# EAGLE board lumped-transmission-line (EAGLE 7.7.0)
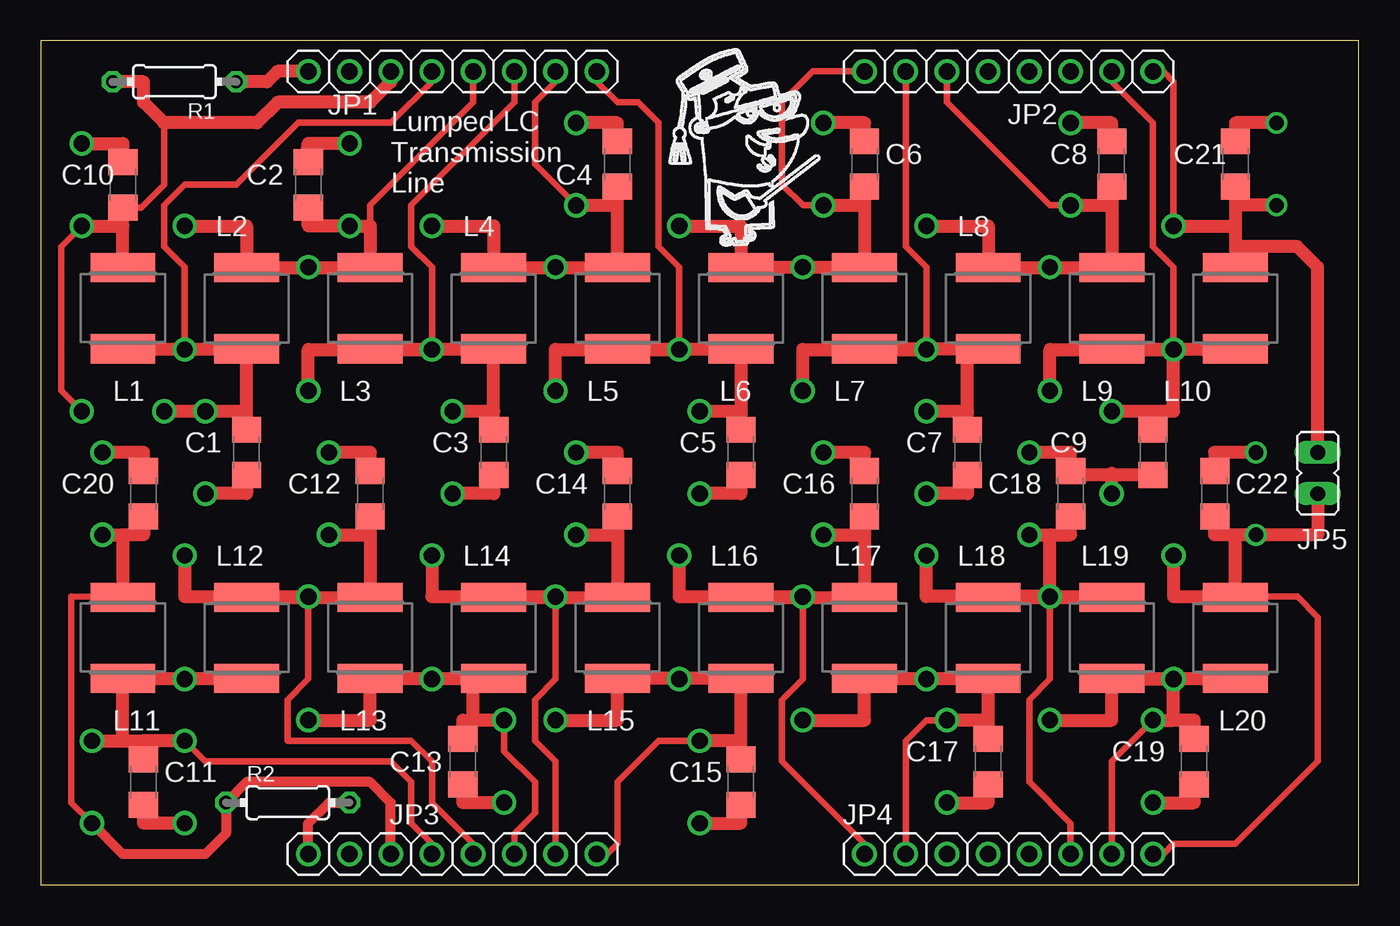
[diagram p0: board, top side]
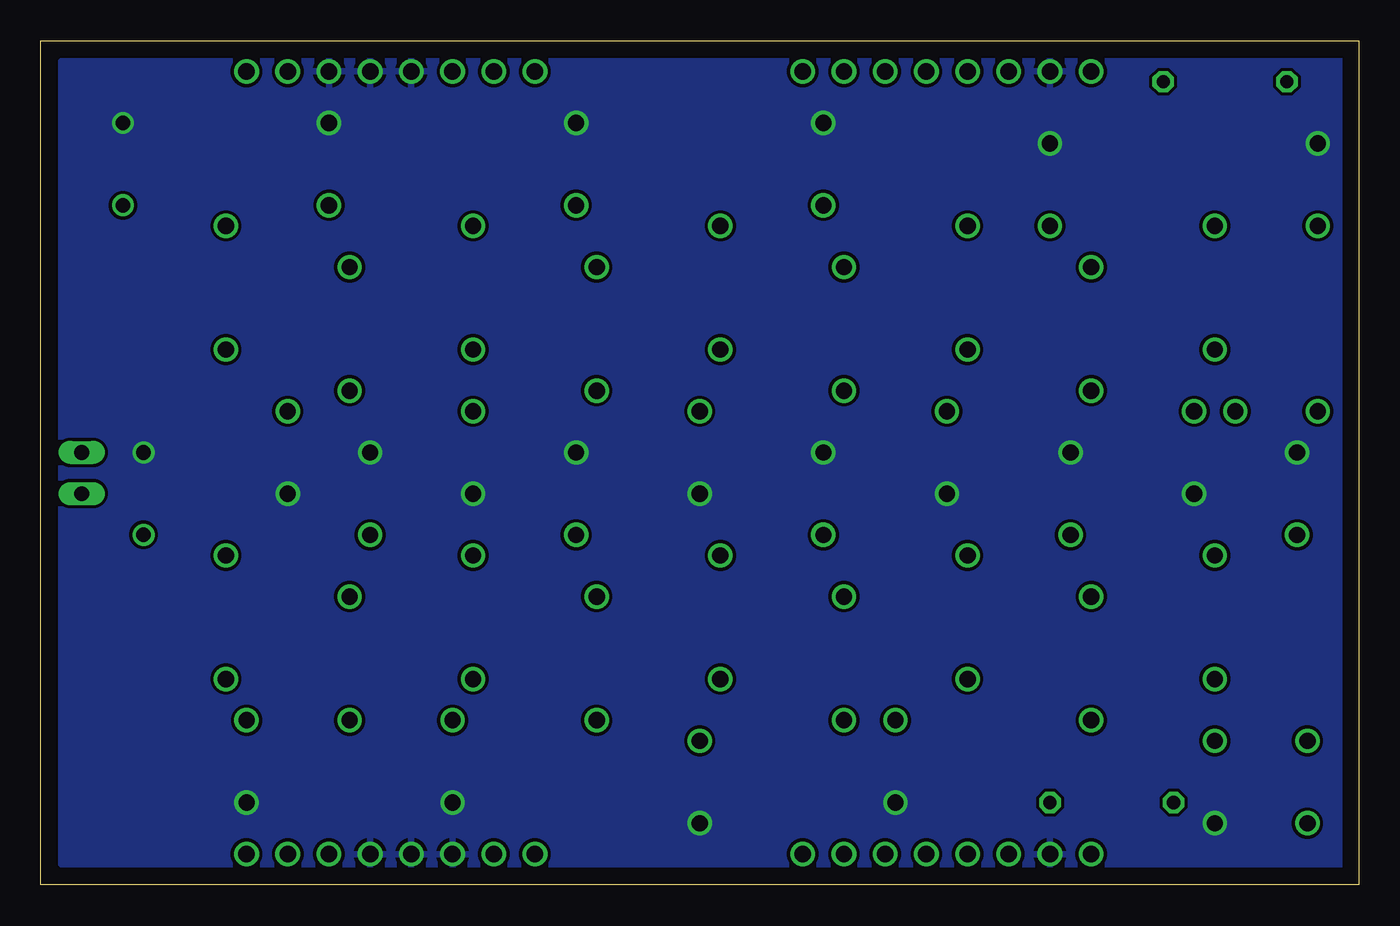
[diagram p1: board, bottom side, seen from below]

Size 81.28 x 52.07 mm. Coordinates in mm from the lower left corner, seen from the top.
Outline: 0,0 81.28,0 81.28,52.07 0,52.07 0,0
Copper layers (1*16): Top 0.035mm / dielectric 1.5mm / Bottom 0.035mm
Design rules "default": minimum track width 10mil, minimum drill 24mil, track to track 8mil, track to pad 8mil, pad to pad 8mil, via to via 8mil, smd to smd 8mil, copper to edge 40mil, drill to drill 8mil, minimum pad ring 10mil, minimum via ring 8mil, stop-mask expansion 4mil, vias tented up to drill 0mil, thermal gap 10mil

## Footprints (pad centres in the part's own frame; a part is rotated, then mirrored left to right if it is on the bottom)
C1206 = smd 1.6 x 1.8: 1 -1.4,0; 2 1.4,0
1X08 = drill 1.016: 1 -8.89,0; 2 -6.35,0; 3 -3.81,0; 4 -1.27,0; 5 1.27,0; 6 3.81,0; 7 6.35,0; 8 8.89,0
JP1 = drill 0.914 long: 1 0,-1.27; 2 0,1.27
L5650M = smd 1.8 x 4: 1 -2.5,0; 2 2.5,0
0204/7 = drill 0.813 octagon: 1 -3.81,0; 2 3.81,0

## Placement (x,y rotation side)
C1  [C1206]  12.7,26.67 270 top
C2  [C1206]  16.51,43.18 90 top
C3  [C1206]  27.94,26.67 270 top
C4  [C1206]  35.56,44.45 90 top
C5  [C1206]  43.18,26.67 270 top
C6  [C1206]  50.8,44.45 90 top
C7  [C1206]  57.15,26.67 270 top
C8  [C1206]  66.04,44.45 90 top
C9  [C1206]  68.58,26.67 270 top
C10  [C1206]  5.08,43.18 90 top
C11  [C1206]  6.35,6.35 270 top
C12  [C1206]  20.32,24.13 90 top
C13  [C1206]  26.04,7.62 270 top
C14  [C1206]  35.56,24.13 90 top
C15  [C1206]  43.18,6.35 270 top
C16  [C1206]  50.8,24.13 90 top
C17  [C1206]  58.42,7.62 270 top
C18  [C1206]  63.5,24.13 90 top
C19  [C1206]  71.12,7.62 270 top
C20  [C1206]  6.35,24.13 90 top
C21  [C1206]  73.66,44.45 90 top
C22  [C1206]  72.39,24.13 90 top
JP1  [1X08]  25.4,50.16 0 top
JP2  [1X08]  59.69,50.16 0 top
JP3  [1X08]  25.4,1.91 0 top
JP4  [1X08]  59.69,1.91 0 top
JP5  [JP1]  78.74,25.4 180 top
L1  [L5650M]  5.08,35.56 270 top
L2  [L5650M]  12.7,35.56 90 top
L3  [L5650M]  20.32,35.56 270 top
L4  [L5650M]  27.94,35.56 90 top
L5  [L5650M]  35.56,35.56 270 top
L6  [L5650M]  43.18,35.56 90 top
L7  [L5650M]  50.8,35.56 270 top
L8  [L5650M]  58.42,35.56 90 top
L9  [L5650M]  66.04,35.56 270 top
L10  [L5650M]  73.66,35.56 90 top
L11  [L5650M]  5.08,15.24 270 top
L12  [L5650M]  12.7,15.24 90 top
L13  [L5650M]  20.32,15.24 270 top
L14  [L5650M]  27.94,15.24 90 top
L15  [L5650M]  35.56,15.24 270 top
L16  [L5650M]  43.18,15.24 90 top
L17  [L5650M]  50.8,15.24 270 top
L18  [L5650M]  58.42,15.24 90 top
L19  [L5650M]  66.04,15.24 270 top
L20  [L5650M]  73.66,15.24 90 top
R1  50  [0204/7]  8.26,49.53 180 top
R2  50  [0204/7]  15.24,5.08 0 top
U$1  PROFF  [PROFF]  38.73,39.37 0 top

## Library data of the parts
C1-C22 L1-L20 R1 R2 = resistor
JP1-JP4 = pinhead
JP5 = jumper
U$1 = logo

## Nets
GND: C1.2 C2.2 C3.2 C4.2 C5.2 C6.2 C7.2 C8.2 C9.2 C10.2 C11.2 C12.2 C13.2 C14.2 C15.2 C16.2 C17.2 C18.2 C19.2 C20.2 C21.2 C22.2 JP1.2 JP2.4 JP2.5 JP2.6 JP3.2 JP4.3 JP4.4 JP4.5
N$1: C3.1 JP1.6 L3.2 L4.1
N$4: C21.1 JP2.8 JP5.1 L10.2
N$11: C22.1 JP4.8 JP5.2 L20.2
N$14: C9.1 JP2.7 L9.2 L10.1
N$20: C19.1 JP4.7 L19.2 L20.1
N$22: JP1.1 R1.1
N$24: C15.1 JP3.8 L15.2 L16.1
N$26: C17.1 JP4.2 L17.2 L18.1
N$27: C18.1 JP4.6 L18.2 L19.1
N$29: JP3.1 R2.2
N$31: C13.1 JP3.6 L13.2 L14.1
N$33: C11.1 JP3.4 L11.2 L12.1
N$35: C6.1 JP2.1 L6.2 L7.1
N$37: C4.1 JP1.7 L4.2 L5.1
N$39: C2.1 JP1.5 L2.2 L3.1
N$41: C10.1 JP1.3 L1.1 R1.2
N$43: C8.1 JP2.3 L8.2 L9.1
N$45: C20.1 JP3.3 L11.1 R2.1
N$46: C1.1 JP1.4 L1.2 L2.1
N$49: C12.1 JP3.5 L12.2 L13.1
N$53: C14.1 JP3.7 L14.2 L15.1
N$54: C5.1 JP1.8 L5.2 L6.1
N$57: C16.1 JP4.1 L16.2 L17.1
N$58: C7.1 JP2.2 L7.2 L8.1

## Tracks (layer width: path | path; a pad name or v marks a point on that pad's centre or on a via)
GND  (via drill 0.9, 1)
  Top 0.406: C13.2 25.91,6.22 | 43.18,5.08 43.31,5.08 C15.2 | C17.2 58.55,6.22 58.42,6.35 | C19.2 70.99,6.22 71.12,6.35 | C7.2 57.28,25.27 57.15,25.4 | C18.2 63.63,25.53 63.5,25.4 | C14.2 35.69,25.53 35.56,25.4 | C5.2 43.31,25.27 43.18,25.4 | C16.2 50.93,25.53 50.8,25.4 | C1.2 12.83,25.27 12.7,25.4 | C12.2 20.45,25.53 20.32,25.4 | C3.2 28.07,25.27 27.94,25.4 | C20.2 6.48,25.53 6.35,25.4 | C10.2 4.95,44.58 5.08,44.45 | C2.2 16.38,44.58 | C4.2 35.69,45.85 35.56,45.72 | C6.2 50.93,45.85 50.8,45.72 | C8.2 66.17,45.85 66.04,45.72 | C21.2 73.53,45.85 73.66,45.72
  Top 0.813: v2.54,45.72 5.08,45.72 5.08,44.45 | v19.05,45.72 16.51,45.72 16.38,44.58 | 35.56,45.72 35.56,46.99 v33.02,46.99 | 50.8,45.72 50.8,46.99 v48.26,46.99 | 66.04,45.72 66.04,46.99 v63.5,46.99 | 63.5,25.4 C18.2 | C18.2 63.5,26.67 v60.96,26.67 | 57.15,25.4 57.15,24.13 v54.61,24.13 | 50.8,25.4 50.8,26.67 v48.26,26.67 | 43.18,25.4 43.18,24.13 v40.64,24.13 | 35.56,25.4 35.56,26.67 v33.02,26.67 | 27.94,25.4 27.94,24.13 v25.4,24.13 | 20.32,25.4 20.32,26.67 v17.78,26.67 | 12.7,25.4 12.7,24.13 v10.16,24.13 | 6.35,25.4 6.35,26.67 v3.81,26.67 | v40.64,3.81 43.18,3.81 C15.2 43.18,5.08 | v55.88,5.08 58.42,5.08 58.42,6.35 | v68.58,5.08 71.12,5.08 71.12,6.35 | v8.89,3.81 6.35,3.81 C11.2 | v28.57,5.08 26.04,5.08 25.91,6.22 | C9.2 63.76,25.27 C18.2 | v66.04,24.13 66.04,25.4 | v76.2,46.99 73.66,46.99 73.66,45.72 | v74.93,26.67 72.39,26.67 C22.2
  pour Bottom: 0.54,1.27 0.54,50.8 80.01,50.8 80.01,1.27
N$1  (via drill 1)
  Top 0.406: v24.13,33.02 24.13,38.1 22.86,39.37 22.86,41.91 29.21,48.26 JP1.6
  Top 0.813: L3.2 24.13,33.06 | 24.13,33.06 L4.1 27.94,29.21 | C3.1 27.94,29.21 | v25.4,29.21 27.94,29.21 | v16.51,30.48 16.51,33.02 v24.13,33.02 24.13,33.06
N$4  (via drill 0.9, 1)
  Top 0.406: JP2.8 69.22,50.16 69.85,49.53 v69.85,40.64
  Top 0.813: C21.1 73.66,41.91 | 73.66,41.91 73.66,40.64 | 73.66,40.64 73.66,39.37 | 73.66,39.37 L10.2 | v76.2,41.91 73.66,41.91 | JP5.1 78.74,38.1 77.47,39.37 73.66,39.37 | v69.85,40.64 73.66,40.64
N$11  (via drill 0.9, 1)
  Top 0.406: JP4.8 69.22,1.91 69.85,2.54 73.66,2.54 78.74,7.62 78.74,16.51 77.47,17.78 73.7,17.78 L20.2 74.97,17.78
  Top 0.813: L20.2 73.66,21.59 | 73.66,21.59 72.39,21.59 C22.1 | JP5.2 78.74,21.59 v74.93,21.59 73.66,21.59 | v69.85,20.32 69.85,17.78 73.7,17.78
N$14  (via drill 1)
  Top 0.406: 69.85,33.06 69.85,38.1 68.58,39.37 68.58,46.99 66.04,49.53 JP2.7
  Top 0.813: v62.23,30.48 62.23,33.02 v69.85,33.02 | L9.2 69.85,33.06 | 69.85,33.06 72.39,33.06 | 72.39,33.06 L10.1 | C9.1 68.58,29.21 | 68.58,29.21 69.85,29.21 v69.85,33.02 | v69.85,33.02 69.85,33.06 | v66.04,29.21 68.58,29.21 | v69.85,33.02 72.39,33.06
N$20  (via drill 1)
  Top 0.406: JP4.7 66.04,7.62 v68.58,10.16
  Top 0.813: v62.23,10.16 66.04,10.16 66.04,12.7 v69.85,12.7 | L19.2 69.85,12.74 | 69.85,12.74 L20.1 | C19.1 71.12,10.16 69.85,10.16 | v68.58,10.16 69.85,10.16 | 69.85,10.16 v69.85,12.7 | v69.85,12.7 69.85,12.74
N$22
  Top 0.813: JP1.1 14.61,50.16 13.97,49.53 R1.1
N$24  (via drill 1)
  Top 0.406: 43.05,7.62 C15.1 | JP3.8 34.92,1.91 35.56,2.54 35.56,6.35 38.1,8.89 v40.64,8.89
  Top 0.813: 39.37,12.74 L16.1 43.18,8.89 | 39.37,12.74 L15.2 35.56,10.16 v31.75,10.16 | C15.1 43.18,8.89 | 43.18,8.89 v40.64,8.89 | v39.37,12.7 39.37,12.74
N$26  (via drill 1)
  Top 0.406: JP4.2 53.34,8.89 54.61,10.16 v55.88,10.16
  Top 0.813: 54.61,12.74 L17.2 50.8,10.16 v46.99,10.16 | 54.61,12.74 L18.1 58.42,10.16 | C17.1 58.42,10.16 | 58.42,10.16 v55.88,10.16 | v54.61,12.7 54.61,12.74
N$27  (via drill 1)
  Top 0.406: 62.23,17.74 62.23,12.7 60.96,11.43 60.96,6.35 63.5,3.81 JP4.6
  Top 0.813: L18.2 62.23,17.74 | 62.23,17.74 L19.1 v62.23,17.78 | v62.23,17.78 62.23,21.59 | 62.23,21.59 63.5,21.59 C18.1 | v60.96,21.59 62.23,21.59 | v62.23,17.78 54.61,17.78 v54.61,20.32 | v62.23,17.78 62.23,17.74
N$29
  Top 0.61: JP3.1 16.51,3.81 17.78,5.08 R2.2
N$31  (via drill 1)
  Top 0.406: JP3.6 29.21,3.17 30.48,4.45 30.48,6.35 28.57,8.26 v28.57,10.16
  Top 0.813: 24.13,12.74 L13.2 20.32,10.16 v16.51,10.16 | 24.13,12.74 26.67,12.74 | C13.1 26.04,10.16 26.67,10.16 | 26.67,10.16 26.67,12.74 | 26.67,12.74 L14.1 | v28.57,10.16 26.67,10.16 | v24.13,12.7 24.13,12.74
N$33  (via drill 1)
  Top 0.406: JP3.4 24.13,2.54 22.86,3.81 22.86,6.35 21.59,7.62 10.16,7.62 v8.89,8.89
  Top 0.813: 8.89,12.74 L11.2 5.08,8.89 | 8.89,12.74 L12.1 | 5.08,8.89 6.35,8.89 | 6.35,8.89 C11.1 | v8.89,8.89 6.35,8.89 | v8.89,12.7 8.89,12.74 | v3.17,8.89 5.08,8.89
N$35  (via drill 1)
  Top 0.406: 50.93,43.18 C6.1 | JP2.1 47.62,50.16 45.72,48.26 45.72,43.18 46.99,41.91 v48.26,41.91
  Top 0.813: C6.1 50.8,41.91 | 50.8,41.91 L7.1 46.99,38.06 | 46.99,38.06 L6.2 43.18,40.64 v39.37,40.64 | v48.26,41.91 50.8,41.91 | v46.99,38.1 46.99,38.06
N$37  (via drill 1)
  Top 0.406: v33.02,41.91 30.48,44.45 30.48,48.26 31.75,49.53 JP1.7
  Top 0.813: 31.75,38.06 L4.2 27.94,40.64 v24.13,40.64 | 31.75,38.06 L5.1 35.56,41.91 | 35.56,41.91 C4.1 | v33.02,41.91 35.56,41.91 | v31.75,38.1 31.75,38.06
N$39  (via drill 1)
  Top 0.406: 20.32,40.64 20.32,41.91 26.67,48.26 JP1.5
  Top 0.813: 16.51,38.06 L2.2 12.7,40.64 v8.89,40.64 | 16.51,38.06 L3.1 20.32,40.64 v19.05,40.64 16.51,40.64 C2.1 | v16.51,38.1 16.51,38.06
N$41  (via drill 1)
  Top 0.406: C10.1 6.22,41.78 7.62,43.18 7.62,46.99 | v2.54,29.21 1.27,30.48 1.27,39.37 v2.54,40.64 | JP1.3 21.59,49.53
  Top 0.813: L1.1 5.08,40.64 | 5.08,40.64 C10.1 | v2.54,40.64 5.08,40.64 | 21.59,49.53 20.32,48.26 14.61,48.26 13.34,46.99 7.62,46.99 6.35,48.26 6.35,49.53 R1.2
N$43  (via drill 1)
  Top 0.406: v63.5,41.91 62.23,41.91 55.88,48.26 JP2.3
  Top 0.813: 62.23,38.06 L8.2 58.42,40.64 v54.61,40.64 | 62.23,38.06 L9.1 66.04,41.91 | C8.1 66.04,41.91 | v63.5,41.91 66.04,41.91 | v62.23,38.1 62.23,38.06
N$45  (via drill 1)
  Top 0.406: L11.1 5.12,17.74 1.91,17.78 1.91,5.08 v3.17,3.81 | R2.1 12.08,5.08
  Top 0.61: v3.17,3.81 5.08,1.91 10.16,1.91 11.43,3.17 R2.1 12.7,6.35 20.32,6.35 21.59,5.08 JP3.3
  Top 0.813: C20.1 6.35,21.59 5.08,21.59 | 5.08,21.59 L11.1 | v3.81,21.59 5.08,21.59
N$46  (via drill 1)
  Top 0.406: 8.89,33.06 8.89,38.1 7.62,39.37 7.62,41.91 8.89,43.18 12.06,43.18 15.88,46.99 21.59,46.99 24.13,49.53 JP1.4
  Top 0.813: L1.2 8.89,33.06 | 8.89,33.06 L2.1 12.7,29.21 | C1.1 12.7,29.21 | 12.7,29.21 v10.16,29.21 v7.62,29.21 | v8.89,33.02 8.89,33.06
N$49  (via drill 1)
  Top 0.406: JP3.5 26.67,2.54 24.13,5.08 24.13,7.62 22.86,8.89 15.24,8.89 15.24,11.43 16.51,12.7 16.51,17.74
  Top 0.813: L12.2 16.51,17.74 | 16.51,17.74 L13.1 20.32,21.59 | C12.1 20.32,21.59 | v17.78,21.59 20.32,21.59 | v8.89,20.32 8.89,17.78 v16.51,17.78 16.51,17.74
N$53  (via drill 1)
  Top 0.406: JP3.7 31.75,7.62 30.48,8.89 30.48,11.43 31.75,12.7 31.75,17.74
  Top 0.813: L14.2 31.75,17.74 | 31.75,17.74 L15.1 35.56,21.59 | C14.1 35.56,21.59 | v33.02,21.59 35.56,21.59 | v24.13,20.32 24.13,17.78 v31.75,17.78 31.75,17.74
N$54  (via drill 1)
  Top 0.406: 39.37,33.06 39.37,38.1 38.1,39.37 38.1,46.99 36.83,48.26 35.56,48.26 34.29,49.53 JP1.8
  Top 0.813: L5.2 39.37,33.06 | 39.37,33.06 L6.1 43.18,29.21 | 43.18,29.21 C5.1 | v40.64,29.21 43.18,29.21 | v31.75,30.48 31.75,33.02 v39.37,33.02 39.37,33.06
N$57  (via drill 1)
  Top 0.406: JP4.1 50.8,2.54 45.72,7.62 45.72,11.43 46.99,12.7 46.99,17.74
  Top 0.813: L16.2 46.99,17.74 | 46.99,17.74 L17.1 50.8,21.59 | C16.1 50.8,21.59 | v48.26,21.59 50.8,21.59 | v39.37,20.32 39.37,17.78 v46.99,17.78 46.99,17.74
N$58  (via drill 1)
  Top 0.406: 54.61,33.06 54.61,38.1 53.34,39.37 JP2.2
  Top 0.813: C7.1 57.15,29.21 | 57.15,29.21 57.15,33.02 L8.1 54.61,33.06 | 54.61,33.06 L7.2 | v54.61,29.21 57.15,29.21 | v46.99,30.48 46.99,33.02 v54.61,33.02 54.61,33.06

## Text on the board
tNames: Lumped LC / Transmission / Line